# EAGLE board ATtinyX4_20-QFN (EAGLE 6.3)
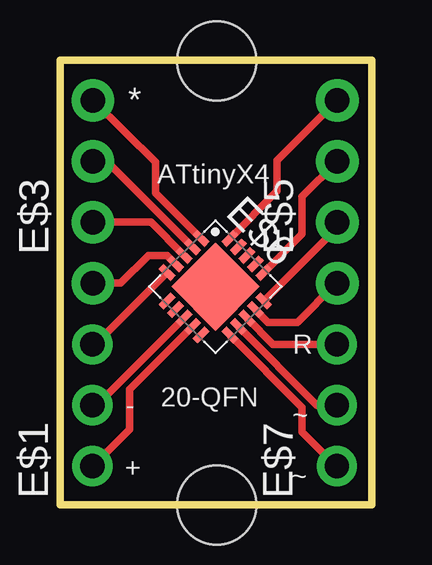
[diagram p0: board, top side]
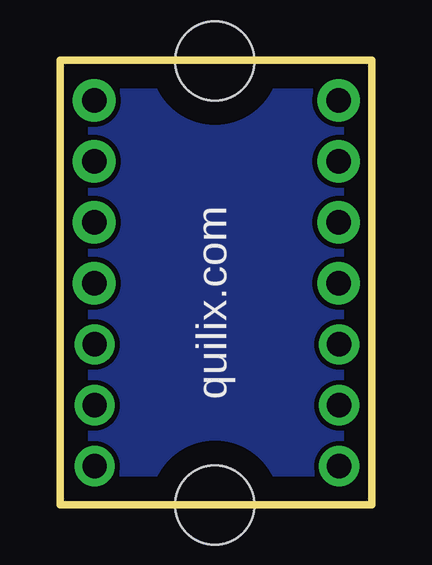
[diagram p1: board, bottom side, seen from below]

Size 13 x 18.55 mm. Coordinates in mm from the lower left corner, seen from the top.
Outline: 13,0 13,18.55 0,18.55 0,0 13,0
Copper layers (1*16): Top 0.035mm / dielectric 1.5mm / Bottom 0.035mm
Design rules "default": minimum track width 10mil, minimum drill 24mil, track to track 8mil, track to pad 8mil, pad to pad 8mil, via to via 8mil, smd to smd 8mil, copper to edge 40mil, drill to drill 8mil, minimum pad ring 10mil, minimum via ring 8mil, stop-mask expansion 4mil, vias tented up to drill 0mil, thermal gap 10mil

## Footprints (pad centres in the part's own frame; a part is rotated, then mirrored left to right if it is on the bottom)
1X03-CLEANBIG = drill 1.016 pad 1.676: 1 -2.54,0; 2 0,0; 3 2.54,0
1X04-CLEANBIG = drill 1.016 pad 1.778: 1 -3.81,0; 2 -1.27,0; 3 1.27,0; 4 3.81,0
20M1 = smd 0.7 x 0.3: 1 -1.85,1; 2 -1.85,0.5; 3 -1.85,0; 4 -1.85,-0.5; 5 -1.85,-1; 11 1.85,-1; 12 1.85,-0.5; 13 1.85,0; 14 1.85,0.5; 15 1.85,1 | smd 0.3 x 0.7: 6 -1,-1.85; 7 -0.5,-1.85; 8 0,-1.85; 9 0.5,-1.85; 10 1,-1.85; 16 1,1.85; 17 0.5,1.85; 18 0,1.85; 19 -0.5,1.85; 20 -1,1.85 | smd 2.6 x 2.6: 21 0,0
STAND-OFF = hole 3.302: 0,0

## Placement (x,y rotation side)
E$1  [1X03-CLEANBIG]  1.35,4.15 90 top
E$3  [1X04-CLEANBIG]  1.37,13.05 90 top
E$5  [1X04-CLEANBIG]  11.57,13.05 90 top
E$6  [20M1]  6.49,9.09 315 top
E$7  [1X03-CLEANBIG]  11.55,4.15 90 top
JP3  STAND-OFF  [STAND-OFF]  6.54,18.51 90 top
JP4  STAND-OFF  [STAND-OFF]  6.54,-0.01 90 top

## Library data of the parts
E$1 E$3 E$5 E$7 = adafruit
E$6 = atmel
JP3 JP4 = SparkFun

## Nets
S$1: E$3.4 E$6.1
S$2: E$3.3 E$6.2
S$3: E$3.2 E$6.3
S$6: E$3.1 E$6.4
S$7: E$1.3 E$6.5
S$8: E$1.2 E$6.8
S$9: E$1.1 E$6.9
S$10: E$5.4 E$6.20
S$11: E$5.3 E$6.16
S$12: E$5.2 E$6.15
S$13: E$5.1 E$6.14
S$14: E$6.13 E$7.3
S$15: E$6.12 E$7.2
S$16: E$6.11 E$7.1

## Tracks (layer width: path | path; a pad name or v marks a point on that pad's centre or on a via)
PPAD
  pour Bottom: 12.45,18.15 0.4,18.15 0.4,0.35 12.6,0.35 12.6,18.1
S$1
  Top 0.305: E$6.1 4,12.99 4,14.3 1.39,16.86 E$3.4
S$2
  Top 0.305: E$6.2 1.97,14.32 E$3.3
S$3
  Top 0.305: E$6.3 3.8,11.78 E$3.2
S$6
  Top 0.305: E$6.4 4.47,10.4 3.7,10.4 2.54,9.24 E$3.1
S$7
  Top 0.305: E$6.5 1.46,6.69 E$1.3
S$8
  Top 0.305: E$6.8 1.54,4.15 E$1.2
S$9
  Top 0.305: E$6.9 2.9,4.8 2.9,3.15 E$1.1
S$10
  Top 0.305: E$6.20 9.05,13.07 9.05,14.35 E$5.4
S$11
  Top 0.305: E$6.16 10.1,11.29 10.1,12.85 E$5.3
S$12
  Top 0.305: E$6.15 11.57,11.56 E$5.2
S$13
  Top 0.305: E$6.14 8.69,7.6 9.9,7.6 11.54,9.24 E$5.1
S$14
  Top 0.305: E$6.13 8.89,6.69 E$7.3
S$15
  Top 0.305: E$6.12 10.72,4.15 E$7.2
S$16
  Top 0.305: E$6.11 10.1,4.06 10.1,3.05 E$7.1

## Text on the board
tSilk: *
_tsilk: ATtinyX4 | R | 20-QFN | - | ~ | + | ~
_bsilk: quilix.com